# Altium PCB Board.PcbDoc (part 2 of 2)
Units mm, origin at the board's own origin, x right, y up, seen from the top; angles counter-clockwise.
Board outline 102.36 x 101.73 mm, 4 copper layers (Top Layer, Layer 1, Layer 2, Bottom Layer), stack 1.57 mm thick; 70 components, 60 nets, 262 pads, 135 vias.
Unrouted connection lines stored in the file: 4.
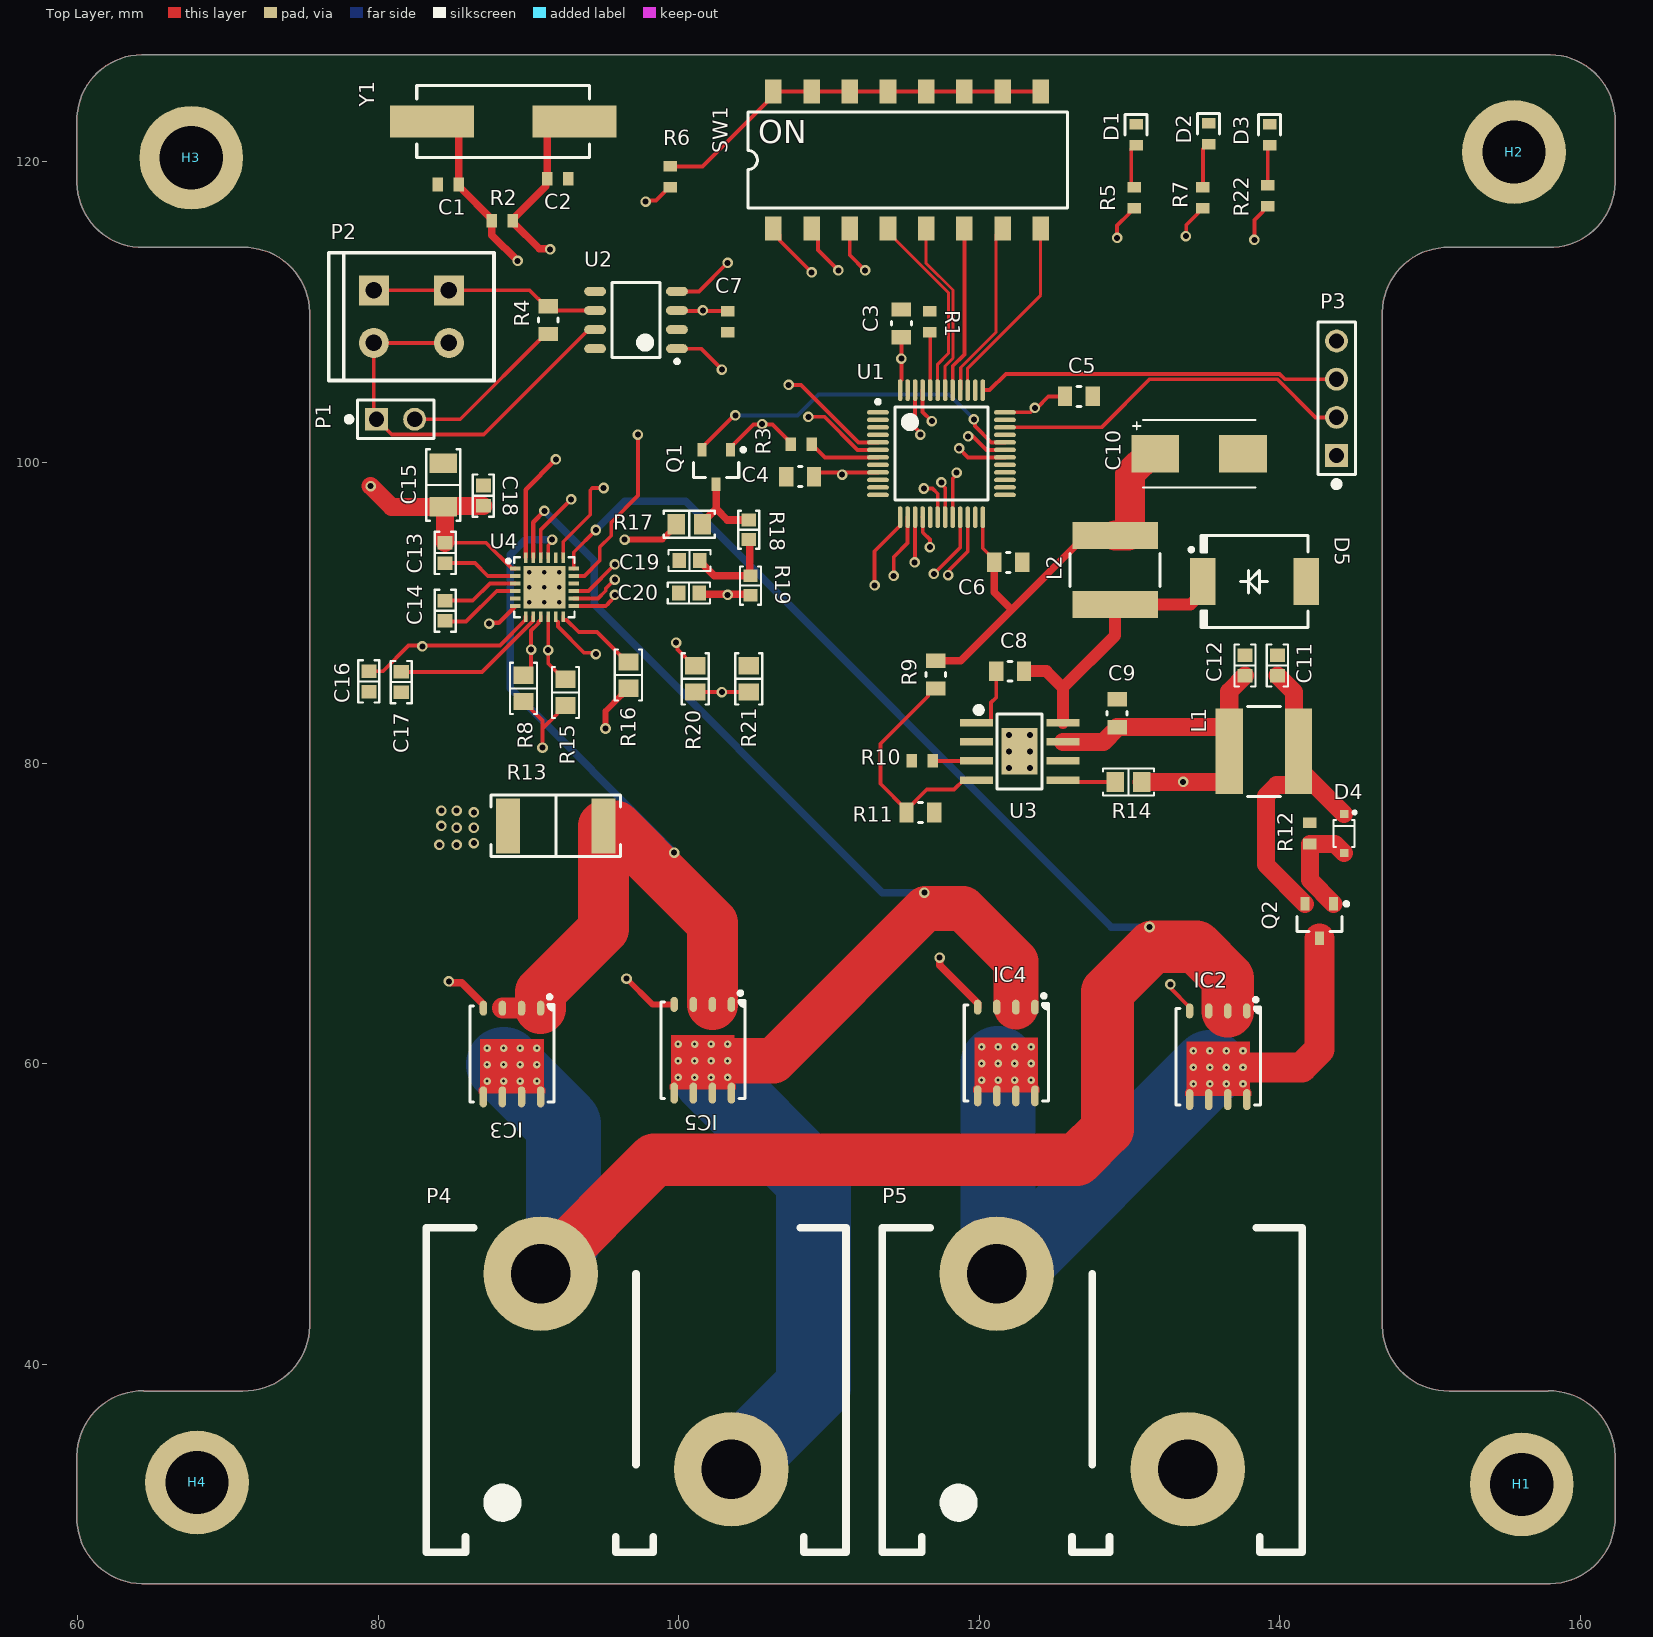
[diagram p0: Top Layer view]

## Silkscreen, mask and mechanical layers (free items; w line width, h text height) (continued)
Mechanical 13: (continued)
  lines w0.254: 64.389,38.212 70.993,38.212 ccw(c71.056,42.593) 75.438,42.53 75.438,109.997 ccw(c71.056,109.934) 70.993,114.315 64.389,114.315 ; 64.389,38.227 ccw(c64.325,33.846) 59.944,33.909 59.944,29.845 ccw(c64.325,29.781) 64.262,25.4 71.12,25.4 151.13,25.4 157.988,25.4 ccw(c157.924,29.781) 162.306,29.845 162.306,33.909 ccw(c157.924,33.846) 157.861,38.227 ; 64.389,114.3 cw(c64.325,118.681) 59.944,118.618 59.944,122.682 cw(c64.325,122.745) 64.262,127.127 71.12,127.127 151.13,127.127 157.988,127.127 cw(c157.924,122.745) 162.306,122.682 162.306,118.618 cw(c157.924,118.681) 157.861,114.3 ; 157.861,38.212 151.257,38.212 cw(c151.194,42.593) 146.812,42.53 146.812,109.997 cw(c151.194,109.934) 151.257,114.315 157.861,114.315

## Text inside footprints (layer, text, board x,y; h text height)
SW1: Top Overlay "ON" at 105.303,121.224 h1.52